# Allegro board WD7992A_FPC_MIC_V2_A_0909.brd
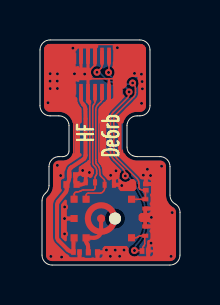
[diagram p0: board, top side]
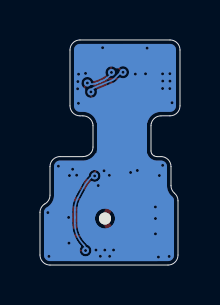
[diagram p1: board, bottom side, seen from below]

Outline 7 x 11.27 mm; copper layers: TOP, BOTTOM. Coordinates in mm from the lower left corner of the outline.
Outline path: 0,10.77 0,7.97 arc(0.15,7.62) 0.5,7.47 0.95,7.47 arc(1.25,7.37) 1.43,7.1 arc(1.45,7.04) 1.45,6.98 1.45,5.71 arc(1.44,5.66) 1.43,5.6 arc(1.37,5.53) 1.3,5.47 arc(1.23,5.44) 1.15,5.43 0.95,5.43 arc(0.6,5.28) 0.45,4.93 0.45,3.98 arc(0.4,3.77) 0.28,3.6 arc(0.15,3.43) 0.1,3.22 0.1,0.5 arc(0.25,0.15) 0.6,0 6.5,0 arc(6.85,0.15) 7,0.5 7,2.63 arc(6.93,2.88) 6.75,3.07 arc(6.57,3.25) 6.5,3.5 6.5,4.93 arc(6.35,5.28) 6,5.43 4.85,5.43 arc(4.75,5.44) 4.65,5.47 arc(4.53,5.54) 4.43,5.64 arc(4.37,5.77) 4.35,5.91 4.35,6.98 arc(4.35,7.04) 4.37,7.1 arc(4.55,7.37) 4.85,7.47 5,7.47 arc(5.35,7.62) 5.5,7.97 5.5,10.77 arc(5.35,11.12) 5,11.27 0.5,11.27 arc(0.15,11.12) 0,10.77

## Design rules (mm)
constraint set DEFAULT: min track width 0.075, pair gap 0.1

## Placement (name value [footprint] x y rotation side)
C3201  GRM033R60J105MEA2D~~CL03A105MQ3CSNH~~V105M0201X5R6R3NXT~~D0201X5R105M6R3NTJ~~JMK063ABJ105MP-F~~TCC0201X5R105M6R3ZT  [C0201_C_0D4_L]  1.58 4.03 0 top
C3202  C0105X5R104M6R3NTZ~~JMK042BJ104MC-W~~V104M0105X5R6R3NZT~~GRM022R60J104ME15D  [C01005_L]  1.82 0.65 0 top
C3205  V330K0105C0G250NZT~~1005CG330K250NT~~C0105C0G330K250NTZ~~GRM0225C1E330JA02D~~TMK042CG330JC-W  [C01005_L]  1.61 4.51 0 top
C3206  V330K0105C0G250NZT~~1005CG330K250NT~~C0105C0G330K250NTZ~~GRM0225C1E330JA02D~~TMK042CG330JC-W  [C01005_L]  5.26 0.7 0 top
C3207  V330K0105C0G250NZT~~1005CG330K250NT~~C0105C0G330K250NTZ~~GRM0225C1E330JA02D~~TMK042CG330JC-W  [C01005_L]  5.29 3.9 90 top
D3201  TEA10201V05A0  [TVS_0D63X0D3X0D27_L]  2.52 4.14 0 top
D3202  TEA10201V05A0  [TVS_0D63X0D3X0D27_L]  3.46 4.02 180 top
D3203  TEA10201V05A0  [TVS_0D63X0D3X0D27_L]  5.27 3.06 90 top
D3204  TEA10201V05A0  [TVS_0D63X0D3X0D27_L]  5.26 1.7 270 top
J3201  OK-128GM010/2-35(001A)  [CON10P_3D06X1D26X0D53_0D35]  2.75 9.57 0 top
L3201  SDCL0603Q82NJT02B03.  [L0201_B_0D35_L]  2.65 0.64 0 top
MIC3201  CDPB18-002  [MIC8_3D5X2D65X1D1]  3.14 2.33 180 top
NOREF  -  []  -2151.73 -2152.29 0 top
NOREF#2  -  [unnamed#2]  3.75 2.33 0 top

## Library data of the parts
C3201 C3202 C3205-C3207 = cap
D3201-D3204 = TEA10201V05A0
J3201 = OK-128GM010-2-35-001A
L3201 = ind
MIC3201 = CDPB18-002

## Footprints (pads in the part's own frame, mm; a bottom-side part is the same pattern mirrored in y, then rotated)
C0201_C_0D4_L
  rect 0.305x0.33 smd: 1(-0.254,0) 2(0.254,0)
C01005_L
  rect 0.229x0.279 smd: 1(-0.152,0) 2(0.152,0)
CON10P_3D06X1D26X0D53_0D35
  rect 0.18x0.485 smd: 1(-0.7,-0.907) 2(-0.35,-0.907) 3(0,-0.907) 4(0.35,-0.907) 5(0.7,-0.907) 6(0.7,0.907) 7(0.35,0.907) 8(0,0.907) 9(-0.35,0.907) 10(-0.7,0.907)
  rect 0.33x0.535 smd: 11(-1.105,0.767) 13(-1.105,-0.767) 14(1.105,-0.767) 16(1.105,0.767)
  rect 0.26x0.42 smd: 12(-1.49,0) 15(1.49,0)
L0201_B_0D35_L
  rect 0.254x0.305 smd: 1(-0.229,0) 2(0.229,0)
MIC8_3D5X2D65X1D1
  round 0.325 hole 0.325 unplated: (-0.61,0)
  rect 0.35x0.35 smd: 1(-1.435,0.965) 2(-1.435,-0.965) 4(0.835,-0.965) 5(0.835,0.965) 6(1.435,0.965) 7(1.435,0) 8(1.435,-0.965)
  custom 1.625x1.625 smd: 3(0.085,0)
TVS_0D63X0D3X0D27_L
  rect 0.2x0.3 smd: 1(-0.233,0) 2(0.233,0)
unnamed#2
  round 0.6 hole 0.6 unplated: (0,0)

## Nets
GND: C3201.2 C3202.2 C3205.2 C3206.2 C3207.2 D3201.1 D3202.1 D3203.1 D3204.1 J3201.2 J3201.5 J3201.8 J3201.9 J3201.10 J3201.11 J3201.12 J3201.13 J3201.14 J3201.15 J3201.16 L3201.2 MIC3201.7
MAG_BARO_I2C_SCL: D3202.2 J3201.4 MIC3201.4
MAG_BARO_I2C_SDA: D3201.2 J3201.3 MIC3201.8
QCC_DMIC1_CLK: C3206.1 D3204.2 J3201.7 MIC3201.1
QCC_DMIC1_DATA: C3207.1 D3203.2 J3201.6 MIC3201.2
VREG_L20A_1P8: C3201.1 C3202.1 C3205.1 J3201.1 MIC3201.6(VDD)
N19215820: L3201.1 MIC3201.3 MIC3201.5

## Via types
v1: diameter 0.35, hole 0.15, TOP to BOTTOM, 47 vias

## Routing (per net, layer and track width the routed paths; a pad name or vN(x,y) marks a point on that pad's centre or on a via; arc(x,y) is an arc through that point)
GND: length 58.9
  TOP w0.06: 5.03,0.24 5.43,0.24 arc(5.55,0.26) 5.66,0.33 5.67,0.35 5.7,0.39 arc(5.71,0.42) 5.71,0.44 5.71,0.7 ; 5.03,0.24 2.88,0.24 ; 5.03,0.24 5.03,0.24 ; 1.98,0.24 1.98,0.24 ; 1.98,0.24 1.98,0.3 arc(1.98,0.3) 1.98,0.3 ; 1.98,0.24 2.8,0.24 ; 1.98,0.24 1.82,0.24 ; 5.71,0.7 5.71,1.93 ; 5.71,0.7 5.67,0.7 5.67,0.7 ; 2.8,0.24 2.88,0.24 ; 2.8,0.24 2.8,0.24 ; 5.71,2.83 5.61,2.83 arc(5.61,2.83) 5.61,2.83 ; 5.71,2.83 5.71,1.93 ; 5.71,2.83 5.71,4.89 arc(5.71,4.9) 5.7,4.92 5.7,4.93 5.68,4.97 arc(5.67,4.98) 5.66,4.99 5.61,5.04 arc(5.6,5.05) 5.59,5.06 5.55,5.08 5.51,5.09 arc(5.49,5.1) 5.46,5.1 4.83,5.1 arc(4.56,5.15) 4.34,5.3 4.28,5.36 arc(4.16,5.54) 4.12,5.75 ; 5.71,2.83 5.71,2.83 ; 0.23,10.6 0.23,8.31 arc(0.25,8.23) 0.29,8.16 arc(0.38,8.08) 0.5,8.05 0.95,8.05 arc(1.41,7.89) 1.66,7.47 arc(1.67,7.47) 1.68,7.47 1.68,5.62 arc(1.66,5.47) 1.6,5.34 arc(1.52,5.25) 1.42,5.17 arc(1.29,5.12) 1.15,5.1 1.15,5.1 arc(1.03,5.07) 0.94,5 0.92,4.97 arc(0.9,4.92) 0.89,4.86 0.89,3.73 0.59,3.44 0.59,0.89 v1(1.08,0.4) ; 0.23,10.6 0.23,10.78 arc(0.25,10.88) 0.31,10.96 arc(0.39,11.02) 0.49,11.04 5.01,11.04 arc(5.1,11.02) 5.19,10.96 arc(5.24,10.88) 5.27,10.77 5.27,8.44 arc(5.27,8.44) 5.27,8.44 5.27,8.32 arc(5.27,8.29) 5.26,8.26 arc(5.17,8.11) 5,8.05 4.85,8.05 arc(4.48,7.95) 4.22,7.68 arc(4.17,7.58) 4.14,7.47 arc(4.12,7.43) 4.09,7.39 3.92,7.22 ; 0.23,10.6 arc(0.23,10.6) 0.23,10.61 ; 1.82,0.24 1.1,0.24 ; 1.82,0.24 1.82,0.24 ; 2.88,0.24 2.88,0.29 arc(2.88,0.29) 2.87,0.29 ; 5.71,1.93 5.6,1.93 ; 2.4,10.76 arc(2.4,10.76) 2.4,10.76 ; 2.75,10.76 arc(2.75,10.76) 2.75,10.77
  TOP w0.075: 3.45,8.02 3.05,7.62 arc(2.97,7.5) 2.94,7.35 2.94,5.32 arc(2.97,5.17) 3.05,5.05 3.67,4.43 arc(3.69,4.4) 3.7,4.36 ; 3.84,4.5 3.99,4.19 ; v1(2.13,4.74) 2.18,4.78 2.25,4.78 2.39,4.93 arc(2.46,5.03) 2.49,5.16 2.49,7.97 arc(2.47,8.09) 2.4,8.18
  TOP w0.08: 3.84,9.36 3.81,9.33 3.45,9.33 ; 2.75,10.02 2.46,9.73 ; 2.52,9.36 2.55,9.33 3.45,9.33 ; 3.45,9.33 3.45,9.33 3.45,9.17
  TOP w0.12: 5.67,0.7 C3206.2 ; 2.87,0.29 2.87,0.3
  TOP w0.15: J3201.5 3.45,9.17 ; J3201.2 2.4,9.33 ; 2.05,10.38 2.05,9.73 ; 2.4,10.38 2.4,9.79 ; 2.75,10.38 2.75,10.02
  TOP w0.18: 2.4,10.38 J3201.9 2.4,10.88 ; 3.45,8.56 3.45,8.02 ; C3201.2 1.84,4.03 2.04,4.03 arc(2.16,4.05) 2.26,4.12 2.29,4.14 2.29,4.46 arc(2.26,4.61) 2.18,4.73 2.17,4.74 v1(2.13,4.74) ; 2.05,10.38 J3201.10 2.05,10.88 ; 2.4,8.18 2.4,8.56 ; 2.75,10.88 J3201.8 2.75,10.38 ; 2.13,4.73 2.13,4.66
  TOP w0.2: 3.7,4.36 D3202.1 3.99,4.02 ; 5.29,4.53 C3207.2 5.61,4.06 ; 1.26,9.17 J3201.12 1.26,9.97 ; v1(2.13,4.74) 2.01,4.61 arc(1.9,4.54) C3205.2 1.77,4.19 arc(1.78,4.11) C3201.2 ; 5.41,0.38 C3206.2 5.41,0.75 arc(5.45,0.94) v1(5.55,1.1) ; 1.22,2.32 v1(1.23,2.33) MIC3201.7 ; 1.64,10.8 J3201.11 1.64,9.88 ; 2.87,0.3 L3201.2 3.21,0.64 v1(3.32,0.75) ; 1.64,9.26 J3201.13 1.64,8.34 ; 5.6,1.93 D3204.1 5.26,2.22 ; 5.61,2.83 D3203.1 5.27,2.54 ; 1.98,0.3 C3202.2
  vias: v1(0.4,8.13) v1(0.51,9.58) v1(0.5,9.21) v1(0.51,8.84) v1(0.54,0.43) v1(0.87,9.57) v1(0.86,9.21) v1(0.87,8.84) v1(0.87,4.99) v1(1.03,4.48) v1(1.23,2.91) v1(1.23,1.56) v1(1.64,10.86) v1(1.72,9.58) v1(2.23,9.56) v1(2.47,4.63) v1(3.53,4.49) v1(3.52,0.44) v1(3.8,4.72) v1(3.76,0.75) v1(3.87,10.88) v1(3.98,0.44) v1(4.09,3.98) v1(4.2,0.75) v1(4.72,9.6) v1(5.07,9.56) v1(5.08,8.1) v1(5.11,9.19) v1(5.12,8.83) v1(5.17,4.5) v1(5.37,4.8) v1(5.53,4.48) v1(5.57,2.38) v1(6.08,4.95) v1(6.55,0.43) v1(6.61,2.63)
MAG_BARO_I2C_SCL: length 6.4
  TOP w0.075: MIC3201.4 2.3,3.49 arc(2.34,3.57) 2.41,3.6 3.03,3.6 arc(3.07,3.61) 3.11,3.64 3.17,3.69 arc(3.22,3.76) 3.23,3.85 D3202.2 3.23,4.21 arc(3.22,4.25) 3.2,4.28 3.03,4.45 arc(3.01,4.48) 3.01,4.51 2.98,4.76 arc(2.97,4.83) 2.95,4.89 arc(2.94,4.9) 2.94,4.9 arc(2.92,4.95) 2.89,5 2.88,5 arc(2.88,5.01) 2.88,5.01 2.87,5.02 2.85,5.04 2.81,5.08 arc(2.8,5.1) 2.79,5.13 arc(2.79,5.16) 2.79,5.18 2.79,5.27 arc(2.79,5.28) 2.79,5.28 2.79,7.77 arc(2.82,7.91) 2.9,8.03 3.05,8.19 arc(3.09,8.24) 3.1,8.3
  TOP w0.15: J3201.4 3.1,8.3
MAG_BARO_I2C_SDA: length 6.4
  TOP w0.075: MIC3201.8 1.7,3.54 arc(1.71,3.58) 1.74,3.62 1.75,3.63 arc(1.78,3.65) 1.83,3.66 1.88,3.66 arc(1.93,3.67) 1.98,3.69 arc(2,3.7) 2.02,3.7 arc(2.04,3.71) 2.07,3.73 arc(2.11,3.75) 2.16,3.76 2.65,3.76 arc(2.72,3.79) 2.75,3.86 D3201.2 2.75,4.39 arc(2.76,4.44) 2.79,4.48 2.8,4.49 arc(2.82,4.53) 2.83,4.58 2.83,4.71 arc(2.81,4.83) 2.74,4.93 2.68,5 arc(2.65,5.04) 2.64,5.09 2.64,7.93 arc(2.65,7.98) 2.68,8.02 2.7,8.05 arc(2.74,8.1) 2.75,8.17 2.75,8.23
  TOP w0.15: 2.75,8.23 J3201.3
QCC_DMIC1_CLK: length 13.9
  TOP w0.075: v1(2.85,9.65) 3.04,9.85 arc(3.09,9.91) 3.1,9.98 3.1,10.05 ; MIC3201.1 4.78,1.37 arc(4.84,1.38) 4.89,1.41 4.9,1.42 arc(4.95,1.45) 5.02,1.47 D3204.2 5.24,1.44 5.24,1.08 arc(5.22,1.02) 5.19,0.97 5.18,0.96 arc(5.14,0.9) 5.13,0.84 5.13,0.73 C3206.1 5.08,0.73 v1(4.72,0.73) ; v1(4.45,8.67) 4.46,8.66 4.46,8.58 arc(4.44,8.46) 4.37,8.36 3.66,7.65 arc(3.56,7.5) 3.52,7.32 3.52,5.69 arc(3.57,5.47) 3.69,5.28 4.14,4.83 arc(4.24,4.69) 4.27,4.52 v1(4.27,4.46)
  TOP w0.15: J3201.7 3.1,10.05
  BOTTOM w0.075: v1(4.72,0.73) 4.72,0.79 arc(4.75,0.91) 4.82,1.01 arc(5.14,1.5) 5.26,2.08 5.26,2.35 arc(5.26,2.38) 5.26,2.4 arc(5.26,2.42) 5.26,2.45 5.26,2.75 arc(5.22,3.08) 5.1,3.38 4.83,3.89 arc(4.67,4.14) 4.48,4.36 4.4,4.43 arc(4.37,4.46) 4.33,4.46 v1(4.27,4.46) ; v1(2.85,9.65) 2.92,9.65 arc(2.96,9.65) 2.99,9.62 3.31,9.3 arc(3.34,9.28) 3.37,9.26 4.32,8.87 arc(4.42,8.79) v1(4.45,8.67)
QCC_DMIC1_DATA: length 10
  TOP w0.075: v1(4.63,9.11) 4.66,9.09 4.66,9.08 4.69,9.05 arc(4.75,8.95) 4.77,8.84 4.77,8.64 arc(4.75,8.52) 4.68,8.42 3.74,7.48 arc(3.72,7.45) 3.71,7.42 arc(3.69,7.36) 3.69,7.3 3.69,5.75 arc(3.73,5.51) 3.87,5.32 4.85,4.34 arc(4.92,4.22) 4.95,4.09 4.95,3.89 arc(4.96,3.84) 5,3.79 arc(5.07,3.76) 5.15,3.75 C3207.1 5.27,3.73 5.27,3.29 4.58,3.29 MIC3201.2 ; 3.45,10.03 3.45,9.7 arc(3.44,9.67) v1(3.43,9.64)
  TOP w0.15: J3201.6 3.45,10.03
  BOTTOM w0.075: v1(3.43,9.64) 3.43,9.59 arc(3.44,9.56) 3.46,9.52 3.65,9.37 3.67,9.35 3.68,9.35 3.8,9.26 3.94,9.2 3.98,9.18 4.13,9.12 arc(4.14,9.12) 4.14,9.12 4.19,9.1 arc(4.21,9.09) 4.24,9.08 arc(4.32,9.07) 4.41,9.05 arc(4.47,9.05) 4.53,9.07 4.59,9.11 arc(4.6,9.12) 4.62,9.12 v1(4.63,9.11)
VREG_L20A_1P8: length 9.7
  TOP w0.18: 2.05,8.56 2.05,8.3 arc(2.08,8.17) 2.15,8.06
  TOP w0.2: MIC3201.6 1.67,1.33 C3202.1 arc(1.51,0.68) 1.38,0.77 0.93,1.23 arc(0.87,1.31) 0.85,1.41 0.85,3 arc(0.87,3.1) 0.92,3.19 1.28,3.64 arc(1.33,3.73) 1.34,3.83 1.31,4.02 C3201.1 arc(1.42,4.19) 1.46,4.37 C3205.1 1.46,4.68 arc(1.48,4.78) 1.54,4.87 2.2,5.31 arc(2.26,5.4) 2.28,5.5 2.28,7.33 2.27,7.81 arc(2.24,7.93) 2.17,8.03 2.15,8.06
N19215820: length 2.3
  TOP w0.2: MIC3201.3 3.06,1.72 arc(2.95,1.47) 2.7,1.36 MIC3201.5 2.31,1.21 arc(2.32,1.12) 2.37,1.05 arc(2.4,0.97) 2.41,0.89 2.41,0.65 L3201.1

## Copper pours and planes (outline as drawn; the poured copper is in the pictures)
GND on TOP (solid shape): 1.78,8.3 0.26,8.3 0.26,10.87 1.78,10.87
GND on TOP (solid shape): 5.21,9.42 3.92,9.42 3.92,10.65 5.21,10.65
GND on TOP (solid shape): 5.23,8.38 5.28,8.36 5.3,8.31 5.3,7.97 5.21,7.76 5,7.67 4.85,7.67 4.43,7.53 4.17,7.16 4.16,7.12 4.13,7.09 3.89,7.09 3.84,7.11 3.82,7.15 3.82,7.3 3.83,7.33 3.85,7.39 4.78,8.33 4.81,8.35 4.83,8.37 4.86,8.38
GND on TOP (solid shape): 3.39,5.57 3.4,5.55 3.47,5.35 3.59,5.18 4.02,4.76 4.03,4.74 4.03,4.72 4.04,4.68 4.03,4.66 3.98,4.54 3.97,4.44 3.97,4.42 3.96,4.39 3.87,4.31 3.85,4.3 3.8,4.3 3.6,4.3 3.55,4.29 3.51,4.26 3.46,4.24 3.42,4.26 3.4,4.28 3.36,4.3 3.33,4.35 3.3,4.38 3.16,4.52 3.15,4.54 3.14,4.56 3.12,4.77 3.1,4.87 3.03,5.02 2.93,5.16 2.93,5.53 2.94,5.58 2.99,5.6 3.36,5.6
GND on TOP (solid shape): 3.33,5.64 3.37,5.62 3.39,5.58 3.46,5.36 3.59,5.18 4.02,4.76 4.03,4.74 4.03,4.72 4.04,4.68 4.03,4.66 3.98,4.54 3.97,4.44 3.97,4.42 3.96,4.39 3.87,4.31 3.85,4.3 3.8,4.3 3.6,4.3 3.55,4.29 3.51,4.26 3.46,4.24 3.42,4.26 3.4,4.28 3.36,4.3 3.33,4.35 3.3,4.38 3.16,4.52 3.15,4.54 3.14,4.56 3.12,4.77 3.1,4.87 3.03,5.02 2.93,5.16 2.93,5.57 2.94,5.62 2.99,5.64
GND on TOP (solid shape): 2.84,11.07 2.89,11.05 2.91,11.01 2.91,10.94 2.9,10.92 2.89,10.89 2.84,10.85 1.96,10.85 1.89,10.83 1.84,10.77 1.84,10.75 1.8,10.73 1.48,10.73 1.41,10.71 1.36,10.65 1.35,10.63 1.32,10.61 0.62,10.61 0.62,8.54 1.32,8.54 1.35,8.51 1.36,8.49 1.41,8.43 1.48,8.41 1.81,8.41 1.84,8.39 1.86,8.34 1.86,8.16 1.88,8.16 1.89,8.12 1.92,8.05 1.99,7.94 2.01,7.91 2.03,7.89 2.06,7.85 2.07,7.81 2.08,7.33 2.08,7.18 2.06,7.13 2.01,7.11 1.72,7.11 1.67,7.13 1.65,7.18 1.65,7.32 1.6,7.59 1.45,7.81 1.22,7.97 0.95,8.02 0.5,8.02 0.29,8.11 0.2,8.32 0.2,10.77 0.29,10.98 0.5,11.07
GND on TOP (solid shape): 4.18,5.61 4.19,5.59 4.26,5.45 4.59,5.18 4.85,5.13 5.45,5.13 5.66,5.04 5.75,4.83 5.75,1.08 5.74,1.05 5.72,1.03 5.63,0.97 5.6,0.95 5.57,0.96 5.55,0.97 5.52,0.97 5.44,0.97 5.39,0.99 5.37,1.2 5.41,1.24 5.43,1.24 5.51,1.29 5.54,1.37 5.54,1.57 5.53,1.61 5.5,1.65 5.48,1.7 5.5,1.74 5.53,1.78 5.54,1.83 5.54,2.03 5.5,2.12 5.41,2.16 5.11,2.16 5.06,2.16 5.04,2.17 4.96,2.24 4.95,2.26 4.94,2.29 4.94,2.47 4.95,2.5 4.96,2.52 5.04,2.59 5.06,2.6 5.12,2.6 5.42,2.6 5.51,2.64 5.54,2.73 5.54,2.93 5.53,2.98 5.51,3.02 5.49,3.06 5.51,3.11 5.53,3.15 5.54,3.19 5.54,3.39 5.54,3.42 5.52,3.49 5.52,3.53 5.55,3.6 5.56,3.64 5.56,3.87 5.56,3.94 5.56,4.17 5.52,4.26 5.43,4.3 5.15,4.3 5.09,4.3 5.05,4.31 5.03,4.32 5.02,4.34 4.98,4.39 4.94,4.43 3.97,5.41 3.91,5.47 3.87,5.54 3.87,5.6 3.9,5.64 4.15,5.64
GND on TOP (solid shape): 5,11.07 5.21,10.98 5.3,10.77 5.3,8.32 5.21,8.11 5,8.02 4.85,8.02 4.78,8.02 4.74,8.04 4.68,8.17 4.68,8.21 4.7,8.24 4.78,8.33 4.88,8.47 4.91,8.64 4.91,8.84 4.91,8.89 4.9,8.94 4.9,8.97 4.92,9.05 4.93,9.11 4.92,9.19 4.88,9.29 4.88,10.54 4.86,10.59 4.82,10.61 4.08,10.61 4.04,10.59 4.02,10.54 4.02,10.37 4.04,10.32 4.08,10.31 4.51,10.31 4.56,10.29 4.58,10.24 4.58,9.44 4.56,9.41 4.54,9.4 4.39,9.29 4.33,9.11 4.33,9.07 4.34,9.01 4.34,8.99 4.32,8.96 4.31,8.94 4.26,8.9 4.22,8.86 4.2,8.84 4.17,8.84 4.13,8.84 4.13,8.54 4.16,8.54 4.19,8.52 4.23,8.46 4.23,8.42 3.56,7.75 3.43,7.55 3.38,7.32 3.38,7.18 3.37,7.13 3.32,7.11 2.99,7.11 2.94,7.13 2.93,7.18 2.93,7.77 2.94,7.86 3,7.93 3.15,8.09 3.17,8.11 3.2,8.15 3.23,8.17 3.25,8.17 3.29,8.2 3.29,8.21 3.3,8.24 3.36,8.29 3.54,8.29 3.63,8.33 3.67,8.42 3.67,8.91 3.66,8.95 3.64,8.98 3.64,9.43 3.71,9.53 3.73,9.64 3.7,9.76 3.63,9.86 3.62,9.87 3.61,9.9 3.61,9.95 3.64,9.98 3.64,10 3.64,10.15 3.66,10.2 3.67,10.24 3.67,10.72 3.66,10.75 3.64,10.81 3.64,11.01 3.66,11.05 3.71,11.07
GND on TOP (solid shape): 2.01,5.6 2.06,5.58 2.08,5.53 2.07,5.46 1.43,5.04 1.4,5.01 1.31,4.9 1.23,4.69 1.22,4.65 1.22,4.36 1.19,4.33 1.16,4.32 1.08,4.28 1.04,4.2 1.04,3.87 1.05,3.83 1.08,3.79 1.09,3.77 1.09,3.72 0.76,3.31 0.68,3.16 0.65,3 0.65,1.41 0.69,1.23 0.78,1.09 1.24,0.63 1.32,0.56 1.4,0.51 1.43,0.5 1.44,0.47 1.48,0.41 1.56,0.39 1.79,0.39 1.86,0.38 2.09,0.38 2.26,0.37 2.29,0.36 2.54,0.36 2.57,0.36 2.72,0.36 2.75,0.36 3,0.36 3.09,0.4 3.13,0.49 3.13,0.79 3.13,0.82 3.13,0.85 3.21,0.93 3.23,0.95 3.26,0.95 4.3,0.95 4.33,0.95 4.36,0.93 4.43,0.84 4.43,0.81 4.43,0.8 4.55,0.48 4.89,0.48 4.91,0.47 4.94,0.44 4.99,0.44 5.22,0.44 5.29,0.43 5.52,0.43 5.61,0.47 5.65,0.56 5.65,0.84 5.61,0.93 5.52,0.97 5.44,0.97 5.39,0.99 5.37,1.2 5.41,1.24 5.43,1.24 5.51,1.29 5.54,1.37 5.54,1.57 5.53,1.61 5.5,1.65 5.48,1.7 5.5,1.74 5.53,1.78 5.54,1.83 5.54,2.03 5.5,2.12 5.41,2.16 5.11,2.16 5.06,2.16 5.04,2.17 4.96,2.24 4.95,2.26 4.94,2.29 4.94,2.47 4.95,2.5 4.96,2.52 5.04,2.59 5.06,2.6 5.12,2.6 5.42,2.6 5.51,2.64 5.54,2.73 5.54,2.93 5.53,2.98 5.51,3.02 5.49,3.06 5.51,3.11 5.53,3.15 5.54,3.19 5.54,3.39 5.53,3.43 5.52,3.47 5.5,3.51 5.55,3.59 5.56,3.64 5.56,3.87 5.56,3.94 5.56,4.17 5.52,4.26 5.43,4.3 5.15,4.3 5.09,4.3 5.05,4.31 5.03,4.32 5.02,4.34 4.98,4.39 4.94,4.43 3.97,5.41 3.93,5.46 3.89,5.5 3.88,5.56 3.92,5.6 4.19,5.6 4.22,5.59 4.24,5.57 4.27,5.52 4.41,5.38 4.71,5.24 4.85,5.23 6,5.23 6.21,5.14 6.3,4.93 6.3,3.5 6.39,3.15 6.76,2.78 6.8,2.63 6.8,0.5 6.71,0.29 6.5,0.2 0.6,0.2 0.39,0.29 0.3,0.5 0.3,3.22 0.33,3.34 0.59,3.68 0.65,3.98 0.65,4.93 0.74,5.14 0.95,5.23 1.15,5.23 1.28,5.25 1.4,5.29 1.52,5.39 1.61,5.52 1.63,5.58 1.66,5.6
GND on BOTTOM (solid shape): 4.42,8.37 4.45,8.37 4.49,8.37 4.53,8.38 5.23,8.38 5.28,8.36 5.3,8.31 5.3,7.97 5.21,7.76 5,7.67 4.85,7.67 4.43,7.53 4.17,7.16 4.16,7.12 4.13,7.09 1.67,7.09 1.64,7.12 1.63,7.16 1.37,7.53 0.95,7.67 0.5,7.67 0.29,7.76 0.2,7.97 0.2,8.31 0.22,8.36 0.27,8.38 4.38,8.38
GND on BOTTOM (solid shape): 4.19,5.6 4.22,5.59 4.27,5.52 4.29,5.49 4.35,5.43 4.41,5.38 4.47,5.34 4.54,5.3 4.61,5.27 4.68,5.25 4.75,5.24 4.82,5.23 4.85,5.23 6,5.23 6.02,5.23 6.07,5.22 6.11,5.21 6.16,5.19 6.2,5.16 6.23,5.13 6.26,5.09 6.28,5.04 6.29,5 6.3,4.95 6.3,4.93 6.3,3.5 6.3,3.46 6.31,3.39 6.32,3.32 6.35,3.25 6.38,3.18 6.41,3.12 6.46,3.06 6.5,3 6.56,2.96 6.62,2.91 6.67,2.88 6.71,2.85 6.75,2.81 6.77,2.76 6.79,2.71 6.8,2.66 6.8,2.63 6.8,0.5 6.8,0.48 6.79,0.43 6.78,0.39 6.76,0.34 6.73,0.3 6.7,0.27 6.66,0.24 6.61,0.22 6.57,0.21 6.52,0.2 6.5,0.2 0.6,0.2 0.58,0.2 0.53,0.21 0.49,0.22 0.44,0.24 0.4,0.27 0.37,0.3 0.34,0.34 0.32,0.39 0.31,0.43 0.3,0.48 0.3,0.5 0.3,2.36 3.25,2.36 3.25,2.3 3.26,2.24 3.27,2.17 3.29,2.12 3.32,2.06 3.36,2.01 3.41,1.96 3.45,1.92 3.51,1.89 3.56,1.86 3.62,1.84 3.69,1.83 3.75,1.83 3.81,1.83 3.88,1.84 3.94,1.86 3.99,1.89 4.05,1.92 4.09,1.96 4.14,2.01 4.18,2.06 4.21,2.12 4.23,2.17 4.24,2.24 4.25,2.3 4.25,2.36 4.24,2.42 4.23,2.49 4.21,2.54 4.18,2.6 4.14,2.65 4.09,2.7 4.05,2.74 3.99,2.77 3.94,2.8 3.88,2.82 3.81,2.83 3.75,2.83 3.69,2.83 3.62,2.82 3.56,2.8 3.51,2.77 3.45,2.74 3.41,2.7 3.36,2.65 3.32,2.6 3.29,2.54 3.27,2.49 3.26,2.42 3.25,2.36 0.3,2.36 0.3,3.22 0.3,3.24 0.31,3.29 0.33,3.34 0.35,3.39 0.39,3.43 0.43,3.47 0.49,3.52 0.53,3.59 0.57,3.65 0.6,3.72 0.63,3.79 0.64,3.86 0.65,3.94 0.65,3.98 0.65,4.46 3.97,4.46 3.97,4.41 3.98,4.36 4,4.32 4.03,4.28 4.06,4.24 4.1,4.21 4.15,4.19 4.19,4.17 4.24,4.16 4.29,4.16 4.33,4.17 4.37,4.18 4.42,4.19 4.44,4.19 4.51,4.12 4.59,4.01 4.67,3.89 4.7,3.82 4.98,3.32 5,3.27 5.04,3.18 5.07,3.09 5.1,2.99 5.11,2.9 5.12,2.8 5.12,2.75 5.12,2.45 5.12,2.08 5.12,2.03 5.11,1.92 5.09,1.81 5.07,1.71 5.04,1.61 4.99,1.51 4.95,1.41 4.89,1.32 4.83,1.23 4.76,1.15 4.6,1 4.56,0.98 4.53,0.95 4.49,0.92 4.47,0.88 4.44,0.84 4.43,0.8 4.42,0.75 4.42,0.7 4.43,0.65 4.45,0.61 4.47,0.56 4.5,0.52 4.54,0.49 4.58,0.46 4.63,0.44 4.67,0.43 4.72,0.43 4.77,0.43 4.82,0.44 4.87,0.46 4.91,0.49 4.94,0.52 4.97,0.56 5,0.61 5.01,0.65 5.02,0.7 5.02,0.75 5.02,0.8 5,0.84 4.98,0.88 4.96,0.93 4.96,0.95 5.01,1.03 5.09,1.12 5.15,1.22 5.21,1.33 5.26,1.44 5.31,1.55 5.34,1.66 5.37,1.78 5.39,1.9 5.4,2.02 5.4,2.08 5.4,2.35 5.4,2.45 5.4,2.75 5.4,2.8 5.39,2.91 5.37,3.01 5.35,3.11 5.32,3.21 5.29,3.31 5.24,3.4 5.22,3.45 4.95,3.96 4.92,4.01 4.85,4.12 4.78,4.22 4.7,4.32 4.62,4.41 4.57,4.46 4.57,4.49 4.56,4.53 4.55,4.58 4.52,4.62 4.5,4.66 4.46,4.69 4.42,4.72 4.38,4.74 4.34,4.75 4.29,4.76 4.24,4.76 4.19,4.75 4.15,4.74 4.1,4.71 4.06,4.68 4.03,4.65 4,4.61 3.98,4.56 3.97,4.51 3.97,4.46 0.65,4.46 0.65,4.93 0.65,4.95 0.66,5 0.67,5.04 0.69,5.09 0.72,5.13 0.75,5.16 0.79,5.19 0.84,5.21 0.88,5.22 0.93,5.23 1.15,5.23 1.18,5.23 1.25,5.24 1.31,5.25 1.37,5.28 1.42,5.31 1.48,5.35 1.52,5.39 1.56,5.44 1.6,5.49 1.63,5.58 1.66,5.6
GND on BOTTOM (solid shape): 5,11.07 5.02,11.07 5.07,11.06 5.11,11.05 5.16,11.03 5.2,11 5.23,10.97 5.26,10.93 5.28,10.89 5.29,10.84 5.3,10.79 5.3,10.77 5.3,8.32 5.3,8.3 5.29,8.25 5.28,8.21 5.26,8.16 5.23,8.13 5.2,8.09 5.16,8.06 5.11,8.04 5.07,8.03 5.02,8.02 4.81,8.02 4.74,8.01 4.67,8 4.6,7.97 4.53,7.95 4.47,7.91 4.41,7.87 4.35,7.82 4.31,7.76 4.26,7.7 4.23,7.64 4.2,7.57 4.17,7.5 4.16,7.43 4.15,7.36 4.15,7.32 4.15,5.81 4.15,5.78 4.16,5.71 4.17,5.64 4.19,5.58 4.22,5.51 4.26,5.45 4.3,5.4 4.34,5.35 4.4,5.3 4.46,5.25 4.52,5.21 4.59,5.18 4.66,5.15 4.74,5.14 4.81,5.13 4.85,5.13 5.45,5.13 5.47,5.13 5.52,5.12 5.56,5.11 5.61,5.09 5.65,5.06 5.68,5.03 5.71,4.99 5.73,4.94 5.74,4.9 5.75,4.85 5.75,4.83 5.75,0.5 5.75,0.48 5.74,0.43 5.73,0.39 5.71,0.34 5.68,0.3 5.65,0.27 5.61,0.24 5.56,0.22 5.52,0.21 5.47,0.2 5.45,0.2 1.15,0.2 1.13,0.2 1.08,0.21 1.04,0.22 0.99,0.24 0.95,0.27 0.92,0.3 0.89,0.34 0.87,0.39 0.86,0.43 0.85,0.48 0.85,0.5 0.85,2.36 3.25,2.36 3.25,2.3 3.26,2.24 3.27,2.17 3.29,2.12 3.32,2.06 3.36,2.01 3.41,1.96 3.45,1.92 3.51,1.89 3.56,1.86 3.62,1.84 3.69,1.83 3.75,1.83 3.81,1.83 3.88,1.84 3.94,1.86 3.99,1.89 4.05,1.92 4.09,1.96 4.14,2.01 4.18,2.06 4.21,2.12 4.23,2.17 4.24,2.24 4.25,2.3 4.25,2.36 4.24,2.42 4.23,2.49 4.21,2.54 4.18,2.6 4.14,2.65 4.09,2.7 4.05,2.74 3.99,2.77 3.94,2.8 3.88,2.82 3.81,2.83 3.75,2.83 3.69,2.83 3.62,2.82 3.56,2.8 3.51,2.77 3.45,2.74 3.41,2.7 3.36,2.65 3.32,2.6 3.29,2.54 3.27,2.49 3.26,2.42 3.25,2.36 0.85,2.36 0.85,4.46 3.97,4.46 3.97,4.41 3.98,4.36 4,4.32 4.03,4.28 4.06,4.24 4.1,4.21 4.15,4.19 4.19,4.17 4.24,4.16 4.29,4.16 4.33,4.17 4.37,4.18 4.42,4.19 4.44,4.19 4.51,4.12 4.59,4.01 4.67,3.89 4.7,3.82 4.98,3.32 5,3.27 5.04,3.18 5.07,3.09 5.1,2.99 5.11,2.9 5.12,2.8 5.12,2.75 5.12,2.45 5.12,2.08 5.12,2.03 5.11,1.92 5.09,1.81 5.07,1.71 5.04,1.61 4.99,1.51 4.95,1.41 4.89,1.32 4.83,1.23 4.76,1.15 4.6,1 4.56,0.98 4.53,0.95 4.49,0.92 4.47,0.88 4.44,0.84 4.43,0.8 4.42,0.75 4.42,0.7 4.43,0.65 4.45,0.61 4.47,0.56 4.5,0.52 4.54,0.49 4.58,0.46 4.63,0.44 4.67,0.43 4.72,0.43 4.77,0.43 4.82,0.44 4.87,0.46 4.91,0.49 4.94,0.52 4.97,0.56 5,0.61 5.01,0.65 5.02,0.7 5.02,0.75 5.02,0.8 5,0.84 4.98,0.88 4.96,0.93 4.96,0.95 5.01,1.03 5.09,1.12 5.15,1.22 5.21,1.33 5.26,1.44 5.31,1.55 5.34,1.66 5.37,1.78 5.39,1.9 5.4,2.02 5.4,2.08 5.4,2.35 5.4,2.45 5.4,2.75 5.4,2.8 5.39,2.91 5.37,3.01 5.35,3.11 5.32,3.21 5.29,3.31 5.24,3.4 5.22,3.45 4.95,3.96 4.92,4.01 4.85,4.12 4.78,4.22 4.7,4.32 4.62,4.41 4.57,4.46 4.57,4.49 4.56,4.53 4.55,4.58 4.52,4.62 4.5,4.66 4.46,4.69 4.42,4.72 4.38,4.74 4.34,4.75 4.29,4.76 4.24,4.76 4.19,4.75 4.15,4.74 4.1,4.71 4.06,4.68 4.03,4.65 4,4.61 3.98,4.56 3.97,4.51 3.97,4.46 0.85,4.46 0.85,4.83 0.85,4.85 0.86,4.9 0.87,4.94 0.89,4.99 0.92,5.03 0.95,5.06 0.99,5.09 1.04,5.11 1.08,5.12 1.13,5.13 1.18,5.13 1.24,5.14 1.3,5.15 1.36,5.18 1.42,5.21 1.47,5.24 1.51,5.29 1.55,5.33 1.59,5.38 1.61,5.43 1.63,5.48 1.64,5.54 1.65,5.59 1.65,5.62 1.65,7.32 1.65,7.36 1.64,7.43 1.63,7.5 1.6,7.57 1.57,7.64 1.54,7.7 1.49,7.76 1.45,7.82 1.39,7.87 1.33,7.91 1.27,7.95 1.2,7.97 1.13,8 1.06,8.01 0.99,8.02 0.95,8.02 0.5,8.02 0.48,8.02 0.43,8.03 0.39,8.04 0.34,8.06 0.3,8.09 0.27,8.13 0.24,8.16 0.22,8.21 0.21,8.25 0.2,8.3 0.2,8.32 0.2,9.65 2.55,9.65 2.55,9.6 2.56,9.55 2.58,9.51 2.61,9.47 2.64,9.43 2.68,9.4 2.73,9.38 2.77,9.36 2.82,9.35 2.87,9.35 2.91,9.36 2.96,9.37 2.99,9.39 3.03,9.38 3.23,9.19 3.26,9.16 3.3,9.14 3.32,9.13 4.14,8.79 4.17,8.75 4.16,8.64 4.16,8.59 4.18,8.55 4.2,8.5 4.23,8.47 4.27,8.43 4.31,8.4 4.36,8.38 4.41,8.37 4.45,8.37 4.5,8.37 4.55,8.38 4.6,8.4 4.64,8.43 4.68,8.47 4.71,8.5 4.73,8.55 4.75,8.59 4.75,8.64 4.81,8.87 4.85,8.91 4.88,8.95 4.9,8.99 4.92,9.04 4.93,9.09 4.93,9.14 4.92,9.18 4.91,9.23 4.89,9.27 4.86,9.31 4.83,9.34 4.79,9.37 4.75,9.39 4.7,9.41 4.65,9.41 4.61,9.41 4.56,9.41 4.51,9.39 4.47,9.37 4.43,9.34 4.4,9.31 4.37,9.27 4.34,9.22 4.32,9.21 3.98,9.33 3.88,9.38 3.78,9.44 3.72,9.5 3.71,9.52 3.72,9.57 3.73,9.62 3.73,9.67 3.72,9.71 3.71,9.76 3.68,9.8 3.66,9.84 3.62,9.87 3.59,9.9 3.54,9.92 3.5,9.94 3.45,9.94 3.4,9.94 3.35,9.93 3.3,9.91 3.25,9.89 3.22,9.86 3.2,9.85 3.09,9.85 3.06,9.86 3.04,9.89 3,9.91 2.96,9.93 2.92,9.95 2.87,9.95 2.82,9.95 2.77,9.94 2.73,9.93 2.68,9.9 2.64,9.87 2.61,9.84 2.58,9.8 2.56,9.75 2.55,9.7 2.55,9.65 0.2,9.65 0.2,10.77 0.2,10.79 0.21,10.84 0.22,10.89 0.24,10.93 0.27,10.97 0.3,11 0.34,11.03 0.39,11.05 0.43,11.06 0.48,11.07 0.5,11.07
GND on TOP (solid shape): 4.03,8.38 4.07,8.37 4.09,8.34 4.1,8.32 4.09,8.28 3.56,7.75 3.43,7.55 3.38,7.32 3.38,7.15 3.37,7.11 3.32,7.09 2.99,7.09 2.94,7.11 2.93,7.15 2.93,7.77 2.94,7.86 3,7.93 3.15,8.09 3.17,8.11 3.21,8.17 3.25,8.17 3.29,8.2 3.29,8.21 3.3,8.24 3.34,8.28 3.36,8.29 3.38,8.29 3.54,8.29 3.6,8.31 3.67,8.37 3.7,8.38
GND on TOP (solid shape): 1.8,8.38 1.83,8.37 1.86,8.35 1.86,8.16 1.88,8.16 1.89,8.12 1.92,8.05 1.99,7.94 2.01,7.91 2.03,7.89 2.06,7.85 2.07,7.81 2.08,7.33 2.08,7.15 2.06,7.11 2.01,7.09 1.67,7.09 1.64,7.12 1.63,7.16 1.37,7.53 0.95,7.67 0.5,7.67 0.29,7.76 0.2,7.97 0.2,8.31 0.22,8.36 0.27,8.38

Small or netless copper shapes (teardrops, artwork), in the pictures only: 49 on TOP, 2 on BOTTOM

## Text on the board
Ref Des/Silkscreen Top: HF | De6rb
